# Altium PCB PCB1.PcbDoc
Units mil, origin at the board's own origin, x right, y up, seen from the top; angles counter-clockwise.
Board outline 2952.73 x 3770 mil, 2 copper layers (Top Layer, Bottom Layer); 67 components, 41 nets, 217 pads, 30 vias.
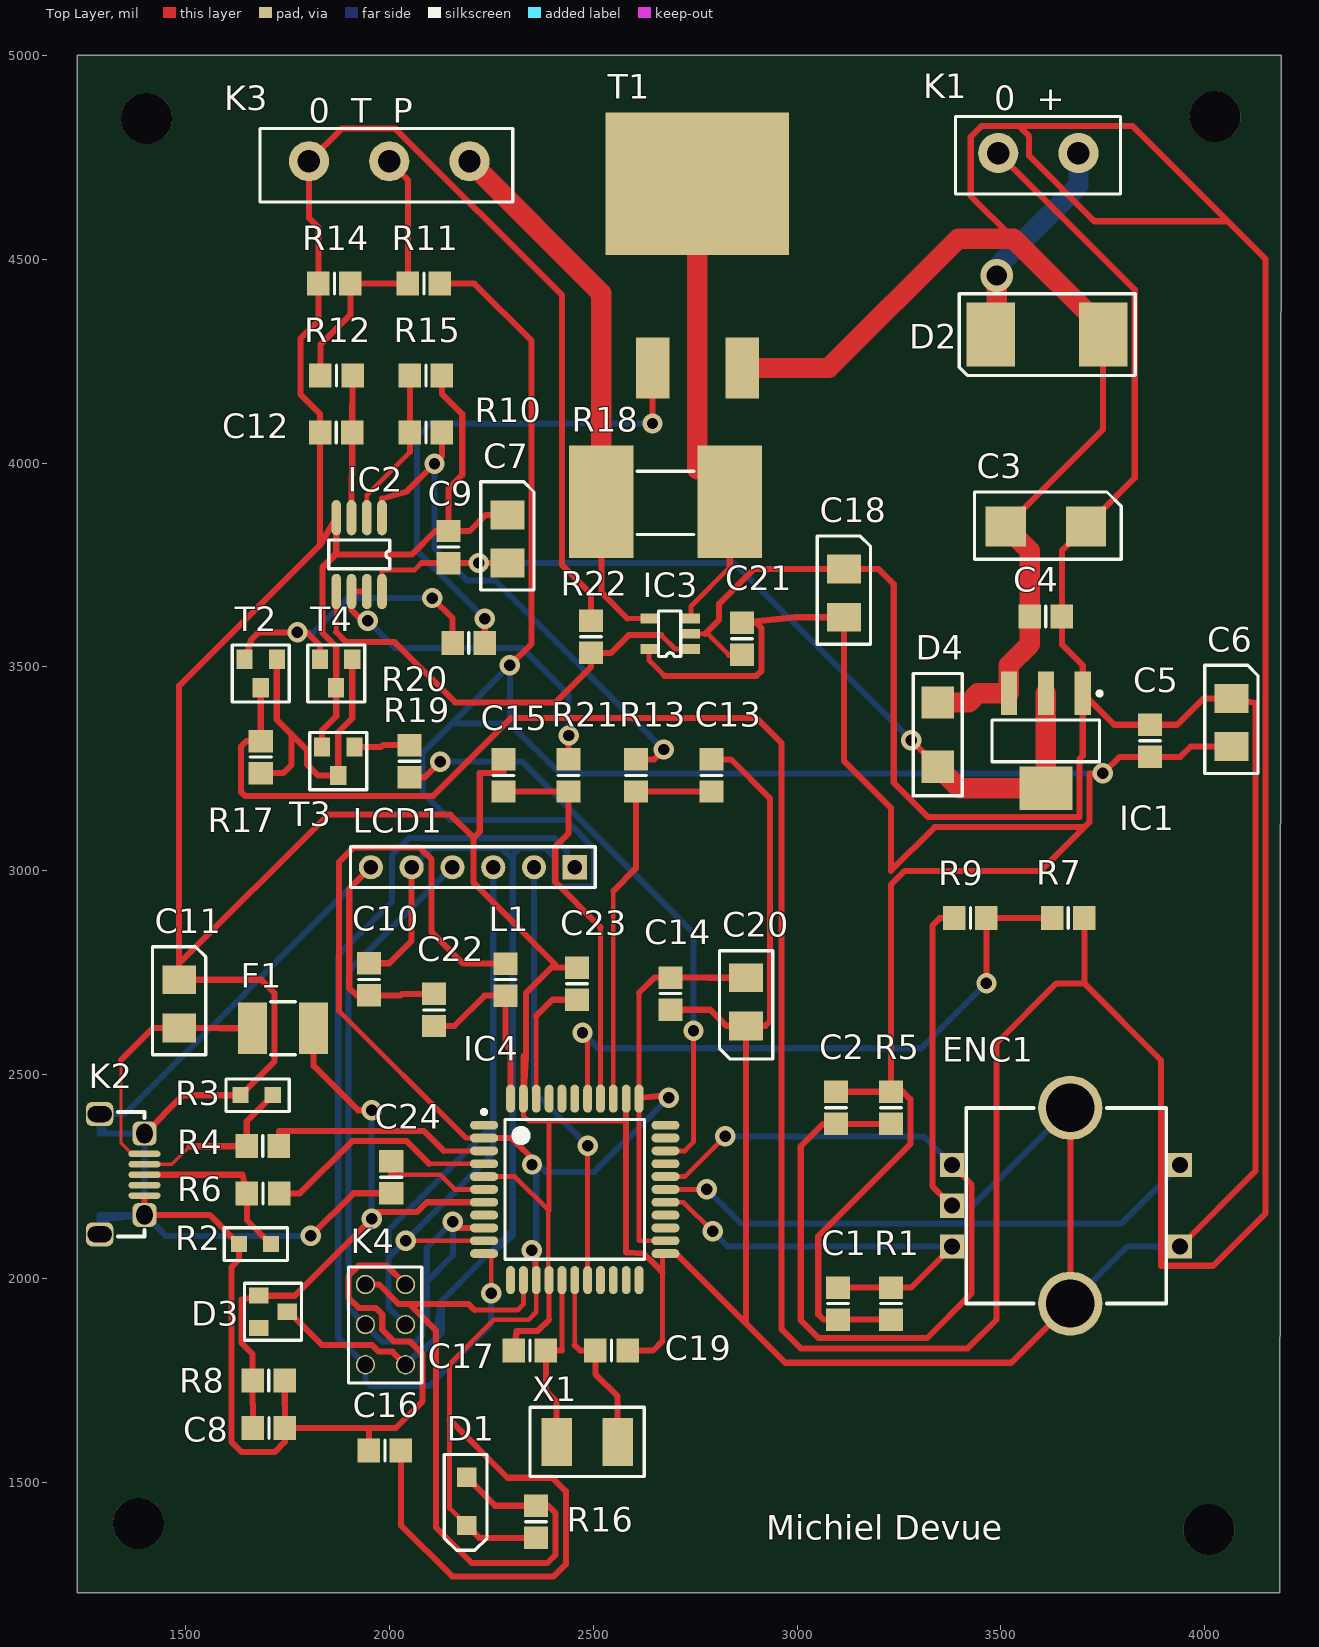
[diagram p0: Top Layer view]
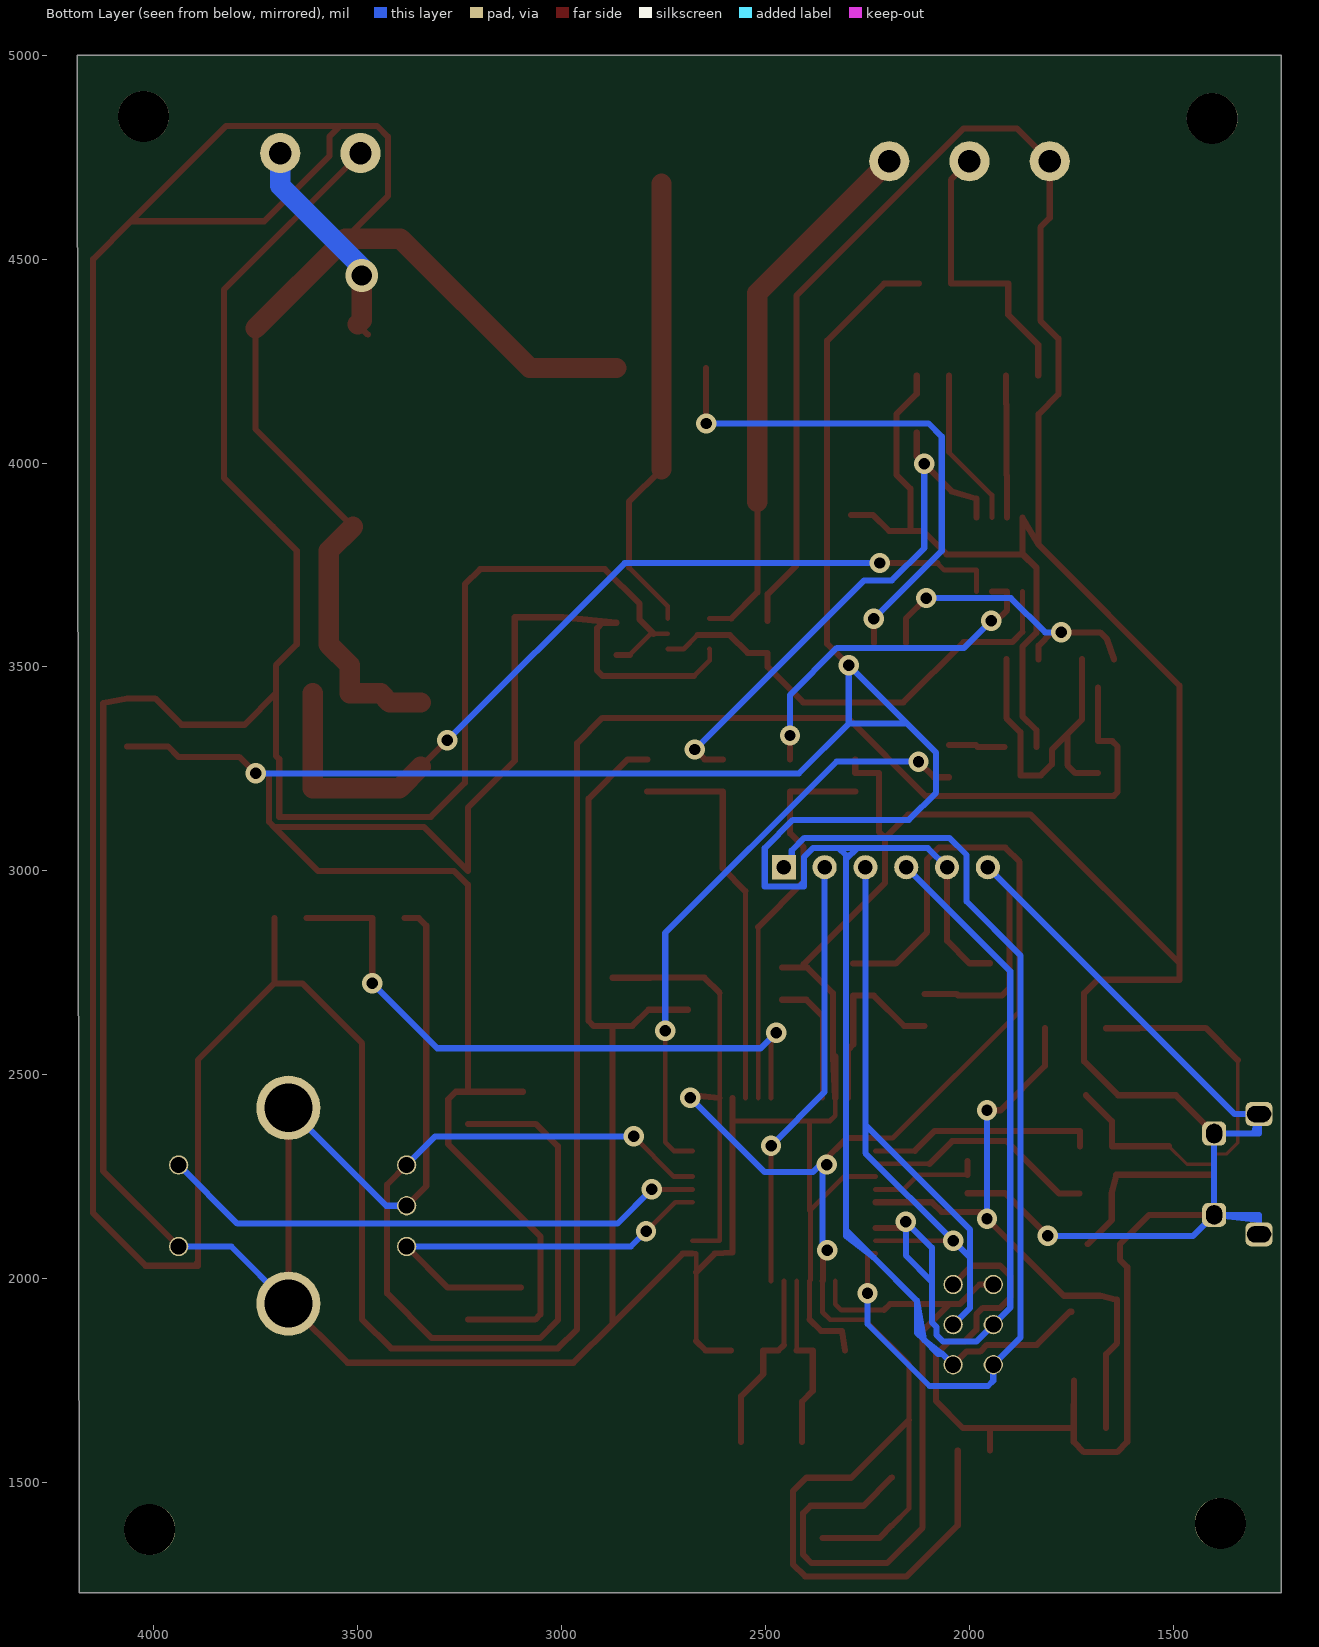
[diagram p1: Bottom Layer view, seen from below]

## Layer stack, top to bottom
Top Solder: solder mask 0.4, Solder Resist, Dk 3.5
Top Layer: signal copper 1.4
Dielectric 1: dielectric 12.6, FR-4, Dk 4.8
Bottom Layer: signal copper 1.4
Bottom Solder: solder mask 0.4, Solder Resist, Dk 3.5

## Board outline
4187.73,5000 1235,5000 1235,1230 4183.01,1230

## Design rules (kind name [scope] priority, off if disabled: settings)
Clearance [All] p1: gap=10 ignorepadtopadclearanceinfootprint=TRUE
HoleSize [All] p1: absolutevalues=TRUE maxlimit=126 minlimit=1 maxpercent=80.000 minpercent=20.000
MinimumSolderMaskSliver [All] p1: minsoldermaskwidth=1
PolygonConnect [All] p1: connectstyle=Relief reliefconductorwidth=10 reliefentries=4 polygonreliefangle="90 Angle" airgapwidth=10
RoutingVias [All] p1: holewidth=28 width=50 viastyle="Through Hole" minholewidth=28 minwidth=50 maxholewidth=28 maxwidth=50
SMDNeckDown [InNet('No Net')] p1: percent=95.000
SilkToSilkClearance [All] p1: silktosilkclearance=5
SilkToSolderMaskClearance [IsPad] p1: minsilkscreentomaskgap=0 clearancetoexposedcopper=TRUE
SolderMaskExpansion [All] p1: expansion=4 istentingtop=FALSE
Width [All] p1: maxlimit=50 minlimit=5 preferedwidth=15 minimp=50.000000 maximp=50.000000 favimp=50.000000
26 further rules are at their usual default settings.

## Components (designator, comment, footprint, x,y, rotation, side; value= is the part's Value field where it differs from the comment)
C1 "Cap" 6-0805_M 3100,1939.06 r270 top value=10n
C2 "Cap" 6-0805_M 3095,2419.06 r90 top value=10n
C3 "Cap Pol1" "Case C" 3610,3844.06 r0 top value=100pF
C4 "Cap" 6-0805_M 3610,3624.06 r180 top value=100n
C5 "Cap" 6-0805_M 3865,3319.06 r270 top value=100n
C6 "Cap Pol1" "Case A" 4065,3364.06 r90 top value=47u
C7 "Cap Pol1" "Case A" 2290,3814.06 r90 top value=10u
C8 "Cap" 6-0805_M 1705,1634.06 r180 top value=100n
C9 "Cap" 6-0805_M 2145,3794.06 r270 top value=100n
C10 "Cap" 6-0805_M 1950,2734.06 r90 top value=100n
C11 "Cap Pol1" "Case A" 1485,2674.06 r90 top value=22u
C12 "Cap" 6-0805_M 1870,4075 r0 top value=10n
C13 "Cap" 6-0805_M 2790,3234.06 r270 top value=10n
C14 "Cap" 6-0805_M 2690,2699.06 r90 top value=100n
C15 "Cap" 6-0805_M 2280,3234.06 r270 top value=1µ
C16 "Cap" 6-0805_M 1989.37,1579.06 r0 top value=100n
C17 "Cap" 6-0805_M 2345,1824.06 r0 top value=22p
C18 "Cap Pol1" "Case A" 3115,3680.94 r90 top value=10u
C19 "Cap" 6-0805_M 2545,1824.06 r180 top value=22p
C20 "Cap Pol1" "Case A" 2875,2679.06 r270 top value="10u 10V"
C21 "Cap" 6-0805_M 2865,3569.06 r90 top value=100n
C22 "Cap" 6-0805_M 2110,2659.06 r270 top value=1u
C23 "Cap" 6-0805_M 2460,2723.43 r270 top value=100n
C24 "Cap" 6-0805_M 2005,2249.06 r90 top value=1u
D1 "Diode" Diode1 2190,1454.06 r270 top
D2 "Diode 10TQ035" DIODE2 3612.8,4315 r180 top
D3 "Diode 10TQ035" DIODE3 1680,1919.06 r270 top
D4 "Diode" DIODE4 3345,3334.06 r90 top
ENC1 "PEC11R-4215F-S0024" ENCODER 3380,2079.06 r0 top
F1 "Fuse 1" Fuse 1740,2614.06 r0 top
IC1 "IC1" SOT223_M 3610,3319.06 r270 top (schematic designator NCP1117-5)
IC2 "IC2" IC2 1982.4,3866.1 r270 top
IC3 "INA138" INA138NA/250G4 2740,3544.06 r180 top
IC4 "ATmega32U4-AU" 44ML_N 2455,2219.06 r0 top
K1 "691111710003" K1 3493.15,4760 r0 top
K2 "K2" K2 1400,2203.82 r180 top
K3 "Soldeer tip" K3 1803.15,4740 r0 top
K4 "ICSP" K4 2040,1789.06 r180 top
L1 "MH2029-300Y" 6-0805_M 2285,2733.43 r270 top value=10mH
LCD1 "Header 6" HDR1X6 2455,3009.06 r180 top
R1 "Res2" 6-0805_M 3230,1939.06 r270 top value=10K
R2 "Res Varistor" R2+R3 1670.63,2085 r0 top
R3 "Res Varistor" R2+R3 1675,2450 r0 top
R4 "Res2" 6-0805_M 1690,2325 r0 top value=22R
R5 "Res2" 6-0805_M 3230,2419.06 r90 top value=10K
R6 "Res2" 6-0805_M 1690.63,2209.06 r0 top value=22R
R7 "Res2" 6-0805_M 3665,2884.06 r0 top value=10K
R8 "Res2" 6-0805_M 1704.37,1750 r180 top value=10K
R9 "Res2" 6-0805_M 3425,2884.06 r0 top value=2K7
R10 "Res2" 6-0805_M 2090,4075 r180 top value=18K
R11 "Res2" 6-0805_M 2085,4440 r0 top value=1M
R12 "Res2" 6-0805_M 1870.63,4215 r180 top value=5K6
R13 "Res2" 6-0805_M 2605,3234.06 r90 top value=5K6
R14 "Res2" 6-0805_M 1865.63,4440 r0 top value=10M
R15 "Res2" 6-0805_M 2090,4215 r180 top value=100R
R16 "Res2" 6-0805_M 2360,1404.06 r270 top value=10K
R17 "Res2" 6-0805_M 1685,3279.06 r90 top value=4K7
R18 "Res2" R18 2677.52,3905 r180 top value=0R020
R19 "Res2" 6-0805_M 2050,3269.06 r90 top value=10K
R20 "Res2" 6-0805_M 2195,3559.06 r0 top value=100R
R21 "Res2" 6-0805_M 2440,3234.06 r90 top value=100K
R22 "Res2" 6-0805_M 2495,3574.06 r90 top value=560K
T1 "IRF9540NSPBF" IRF9540NSPBF 25060.62,-28576.8 r0 top
T2 "NPN" BC847 1685,3519.06 r180 top
T3 "NPN" BC847 1875,3304.06 r180 top
T4 "NPN" BC857 1870,3519.06 r180 top
X1 "ABS25-32.768KHZ-6-T" X 2485.2,1600 r180 top

## Footprints (in the part's own frame and the unit in brackets; to place one, negate y for a bottom-side part, rotate by r counter-clockwise, add the part's x,y. Pads: shape width x height; smd on the part's side, far side on the other; paste and mask are expansions set on the pad)
6-0805_M [mm] "Chip Resistor, Body 2.0x1.2mm, IPC Low Density"
  rect 1.4x1.5 smd: 1(-1,0) 2(1,0)
  silkscreen extent 0,-0.65 0,0.65, body extent -1.07,-0.7 1.07,0.7, height 0.7
44ML_N [mm] "Thin QFP, 44-Leads, Body 10x10mm, Pitch 0.8mm, IPC Medium Density"
  oval 1.75x0.55 smd: 1(-5.65,4) 2(-5.65,3.2) 3(-5.65,2.4) 4(-5.65,1.6) 5(-5.65,0.8) 6(-5.65,0) 7(-5.65,-0.8) 8(-5.65,-1.6) 9(-5.65,-2.4) 10(-5.65,-3.2) 11(-5.65,-4) 23(5.65,-4) 24(5.65,-3.2) 25(5.65,-2.4) 26(5.65,-1.6) 27(5.65,-0.8) 28(5.65,0) 29(5.65,0.8) 30(5.65,1.6) 31(5.65,2.4) 32(5.65,3.2) 33(5.65,4)
  oval 0.55x1.75 smd: 12(-4,-5.65) 13(-3.2,-5.65) 14(-2.4,-5.65) 15(-1.6,-5.65) 16(-0.8,-5.65) 17(0,-5.65) 18(0.8,-5.65) 19(1.6,-5.65) 20(2.4,-5.65) 21(3.2,-5.65) 22(4,-5.65) 34(4,5.65) 35(3.2,5.65) 36(2.4,5.65) 37(1.6,5.65) 38(0.8,5.65) 39(0,5.65) 40(-0.8,5.65) 41(-1.6,5.65) 42(-2.4,5.65) 43(-3.2,5.65) 44(-4,5.65)
  silkscreen extent -5.77,-4.35 4.35,4.95, body extent -5,-5 5,5, height 1.2
BC847 [mm]
  rect 1x1.2 smd: 1(0,1.778) 2(-1,0) 3(1,0)
  silkscreen extent -1.78,-0.89 1.78,2.67
BC857 [mm]
  rect 1x1.2 smd: 1(1,0) 2(-1,0) 3(0,1.778)
  silkscreen extent -1.78,-0.89 1.78,2.67
"Case A" [mm]
  rect 1.8x2.1 smd: 1(-1.5,0) 2(1.5,0)
  silkscreen extent -3.17,-1.65 3.56,1.67
"Case C" [mm]
  rect 2.5x2.5 smd: 1(-2.5,0) 2(2.5,0)
  silkscreen extent -4.44,-2.03 4.7,2.16
Diode1 [mm]
  rect 1.2x1.2 smd: 1(-1.5,0) 2(1.5,0)
  silkscreen extent -2.92,-1.4 3.05,1.27
DIODE2 [mm]
  rect 3x4 smd: 1(-3.5,0) 3(3.5,0)
  silkscreen extent -5.5,-2.54 5.46,2.54
DIODE3 [mm]
  rect 1x1.2 smd: 1(0,1.778) 2(1,0) 3(-1,0)
  silkscreen extent -1.78,-0.89 1.78,2.67
DIODE4 [mm]
  rect 2x2 smd: 1(-2,0) 2(2,0)
  silkscreen extent -3.81,-1.52 3.81,1.52
ENCODER [mm]
  rect 1.5x1.5 / inner round 1.2 / far side round 1.2 hole 1: 1(14.2,5.08) 2(14.2,0) 3(0,0) 4(0,2.54) 5(0,5.08)
  round 4 hole 3: 6(7.366,8.636) 7(7.366,-3.556)
  silkscreen extent 0.89,-3.56 13.33,8.64
Fuse [mm]
  rect 1.8x3.2 smd: 1(-1.9,0) 2(1.9,0)
  silkscreen extent -0.8,-1.65 0.76,1.65
HDR1X6 [mm] "Connector; Header; 6 Position"
  rect 1.5x1.5 hole 0.9: 1(0,0)
  round 1.5 hole 0.9: 2(2.54,0) 3(5.08,0) 4(7.62,0) 5(10.16,0) 6(12.7,0)
  silkscreen extent -1.27,-1.27 13.97,1.27
IC2 [mm]
  oval 2.2x0.6 smd: 1(0,0) 2(0,-0.95) 3(0,-1.9) 4(0,-2.85) 5(4.6,-2.85) 6(4.6,-1.9) 7(4.6,-0.95) 8(4.6,0)
  silkscreen extent 1.4,-3.33 3.18,0.48
INA138NA/250G4 [mm]
  rect 1.1x0.6 smd: 1(0,0) 2(0,-0.95) 3(0,-1.9) 4(2.6,-1.9) 5(2.6,0)
  silkscreen extent 0.63,-2.38 2.03,0.48
IRF9540NSPBF [mil]
  rect 450x350 smd: D(-22305.62,33261.8)
  rect 82x150 smd: G(-22415,32810) S(-22195,32810)
K1 [mm]
  round 2.5 hole 1.4: 1(0,0) 2(5,0)
  silkscreen extent -2.67,-2.54 7.62,2.29
K2 [mm]
  oval 2x0.4 smd: 1(0,-2.6) 2(0,-1.95) 3(0,-1.3) 4(0,-0.65) 5(0,0)
  rrect50% 1.7x1.5 hole 1 slot 1.5 at 0 deg: SHIELD1(2.794,-5.08) SHIELD4(2.794,2.413)
  rrect50% 1.5x1.5 hole 1.2 slot 1 at 0 deg: SHIELD2(0,-3.867) SHIELD3(0,1.2)
  silkscreen extent 0,-5.21 1.65,2.54
K3 [mm]
  round 2.5 hole 1.4: 1(0,0) 2(5,0) 3(10,0)
  silkscreen extent -3.05,-2.54 12.7,2.03
K4 [mm]
  round 1.2 hole 1: 1(0,0) 2(2.5,0) 3(0,-2.5) 4(2.5,-2.5) 5(0,-5) 6(2.5,-5)
  silkscreen extent -1.02,-6.1 3.56,1.14
R2+R3 [mm]
  rect 1x1 smd: 1(-1,0) 2(1,0)
  silkscreen extent -1.9,-1.02 2.03,1.02
R18 [mm]
  rect 4x7 smd: 1(-4,0) 2(4,0)
  silkscreen extent -1.78,-1.91 1.78,2.03
SOT223_M [mm] "SOT223, 4-Leads, Body 6.5x3.5mm, Pitch 2.3mm, Lead Span 7mm, IPC Low Density"
  rect 2.7x1 smd: 1(-2.95,2.3) 2(-2.95,0) 3(-2.95,-2.3)
  rect 2.7x3.3 smd: 4(2.95,0)
  silkscreen extent -3.07,-3.35 1.3,3.48, body extent -1.85,-3.35 1.85,3.35, height 1.7
X [mm]
  rect 1.9x3 smd: 1(-1.9,0) 4(1.9,0)
  silkscreen extent -3.56,-2.16 3.56,2.16

## Part data
C1 C2 C4 C5 C8 C9 C10 C12 C13 C14 C15 C16 C17 C19 C21 C22 C23 C24: "Capacitor", LatestRevisionDate=17-Jul-2002, LatestRevisionNote="Re-released for DXP Platform.", PackageDescription="Radial Cap, Thru-Hole; 2 Leads; 0.3 in Pin Spacing", PackageReference=RAD-0.3, Published=8-Jun-2000, Publisher="Altium Limited"
C3 C6 C7 C11 C18 C20: "Polarized Capacitor (Radial)", LatestRevisionDate=17-Jul-2002, LatestRevisionNote="Re-released for DXP Platform.", PackageDescription="Polarized Capacitor (Radial); 2 Leads", PackageReference=RB7.6-15, Published=8-Jun-2000, Publisher="Altium Limited"
D1 D4: "Default Diode", Code_JEDEC=DO-214-AB, LatestRevisionDate=17-Jul-2002, LatestRevisionNote="Re-released for DXP Platform.", PackageDescription="DO-214-AB/SMC; 2 C-Bend Leads; Body 7.9 x 5.9 mm, inc. leads (LxW)", PackageReference=SMC, PackageVersion=Sep-1996, Published=8-Jun-2000, Publisher="Altium Limited"
D2 D3: "Schottky Rectifier", ComponentLink1Description="Manufacturer Link", ComponentLink1URL=http://www.irf.com/, ComponentLink2Description=Datasheet, ComponentLink2URL=http://www.irf.com/product-info/datasheets/data/10tq.pdf, DatasheetVersion=PD-2.057B, LatestRevisionDate=17-Jul-2002, LatestRevisionNote="Re-released for DXP Platform.", Note="Terminal 2 is the TAB and is electrically connected to the cathode", PackageDescription="TO, Thru-Hole, Vertical, Heatsink Mounted; 3 In-Line Leads (1 Absent); Pitch 2.54 mm", PackageReference=TO-220AC, PackageVersion=Feb-1998, Published=8-Jun-2000, Publisher="Altium Limited"
ENC1: library part CMP-1747-00012-1, "12 mm Incremental Encoder, 24 Detent, -30 to 70 degC, 5-Pin THD, RoHS, Bulk", Case\Package=Axial, Max Operating Temperature="155 degC", Min Operating Temperature="-55 degC", Package Quantity=200, Power Rating="250 mW", Resistance="100 kohm", Tolerance=1%, Voltage Rating="250 V", ComponentLink1Description="Manufacturer URL", ComponentLink1URL=http://www.bourns.com/, ComponentLink2Description=Datasheet, ComponentLink2URL=http://www.bourns.com/docs/Product-Datasheets/PEC11R.pdf, DatasheetVersion=Jul-14, Length="0.248 inch", Mount="Through Hole", PackageDescription="5-Pin Through Hole Device, Body 12.5 x 13.4 mm", PackageReference=PEC11R-4XXXF-SXXXX, Packaging=Bulk, RoHSCompliant=true
F1: "Fuse", LatestRevisionDate=17-Jul-2002, LatestRevisionNote="Re-released for DXP Platform.", PackageDescription="Thru-Hole; 2 Leads", PackageReference=PIN-W2/E2.8, Published=8-Jun-2000, Publisher="Altium Limited"
IC2: library part MCP6002-E/SN, "OP Amp Dual GP R-R I/O 6V Automotive 8-Pin SOIC N Tube", Manufacturer=Microchip, Supplier Part Number 1=MCP6002-E/SN-ND, Category="Amplifiers - Op Amps, Buffer, Instrumentation", ComponentLink1Description=https://datasheet.ciiva.com/19474/1285896-19474572.pdf?src-supplier=Jameco, ComponentLink1URL=https://datasheet.ciiva.com/19474/1285896-19474572.pdf?src-supplier=Jameco, ComponentLink2Description=https://datasheet.ciiva.com/1793/21733j-1793395.pdf?src-supplier=Digi-Key, ComponentLink2URL=https://datasheet.ciiva.com/1793/21733j-1793395.pdf?src-supplier=Digi-Key, ComponentLink3Description=https://datasheet.ciiva.com/16378/filehandler-aspxddocname-en011705-16378791.pdf?src-supplier=Future+Electronics, ComponentLink3URL=https://datasheet.ciiva.com/16378/filehandler-aspxddocname-en011705-16378791.pdf?src-supplier=Future+Electronics, ComponentLink4Description=https://datasheet.ciiva.com/4756/21733e-41017-4756360.pdf?src-supplier=Mouser, ComponentLink4URL=https://datasheet.ciiva.com/4756/21733e-41017-4756360.pdf?src-supplier=Mouser, ComponentLink5Description=https://datasheet.ciiva.com/7653/524878-7653496.pdf?src-supplier=Element14, ComponentLink5URL=https://datasheet.ciiva.com/7653/524878-7653496.pdf?src-supplier=Element14, ComponentLink6Description=https://datasheet.ciiva.com/11706/jp011705-11706856.pdf?src-supplier=Avnet, ComponentLink6URL=https://datasheet.ciiva.com/11706/jp011705-11706856.pdf?src-supplier=Avnet, ComponentLink7Description=https://datasheet.ciiva.com/14151/bsmicrochip-op-verstaerker-mcp600-en-14151452.pdf?src-supplier=Distrelec, ComponentLink7URL=https://datasheet.ciiva.com/14151/bsmicrochip-op-verstaerker-mcp600-en-14151452.pdf?src-supplier=Distrelec, Manufacturer Part Number=MCP6002-E/SN, Pricing 1="1=0,36000, 25=0,30000, 100=0,27000 (USD)", RoHS=Yes, Stock 1=1931, Supplier 1=Digi-Key
IC3: library part INA138NA/250G4, "SP Amp Current Sense Amp Single 36V 5-Pin SOT-23 T/R", Case/Package=SOT-23, Input Bias Current=2uA, Input Offset Voltage (Vos)=1mV, Manufacturer="Texas Instruments", Max Operating Temperature=125°C, Max Supply Voltage=36V, Min Operating Temperature=-40°C, Min Supply Voltage=2.7V, Nominal Supply Current=25uA, Operating Supply Current=45uA, Operating Supply Voltage=28V, Supplier Part Number 1=296-35902-1-ND, Accuracy=0.5%, Bandwidth=800kHz, Category="Amplifiers - Op Amps, Buffer, Instrumentation", Common Mode Rejection Ratio=100dB, ComponentLink1Description=https://datasheet.ciiva.com/1940/ina138-1940082.pdf?src-supplier=Digi-Key, ComponentLink1URL=https://datasheet.ciiva.com/1940/ina138-1940082.pdf?src-supplier=Digi-Key, ComponentLink2Description=https://datasheet.ciiva.com/1484/1864388-1484499.pdf?src-supplier=Element14, ComponentLink2URL=https://datasheet.ciiva.com/1484/1864388-1484499.pdf?src-supplier=Element14, ComponentLink3Description=https://datasheet.ciiva.com/2977/ina168-2977829.pdf?src-supplier=Avnet, ComponentLink3URL=https://datasheet.ciiva.com/2977/ina168-2977829.pdf?src-supplier=Avnet, ComponentLink4Description=https://datasheet.ciiva.com/18617/ina138-18617510.pdf?src-supplier=Digi-Key, ComponentLink4URL=https://datasheet.ciiva.com/18617/ina138-18617510.pdf?src-supplier=Digi-Key, ComponentLink5Description=https://datasheet.ciiva.com/18617/ina138-18617511.pdf?src-supplier=Digi-Key, ComponentLink5URL=https://datasheet.ciiva.com/18617/ina138-18617511.pdf?src-supplier=Digi-Key, ComponentLink6Description=https://datasheet.ciiva.com/18617/ina138-18617512.pdf?src-supplier=Digi-Key, ComponentLink6URL=https://datasheet.ciiva.com/18617/ina138-18617512.pdf?src-supplier=Digi-Key, Contact Plating=Tin,Matte, Height=1.15mm, Lead Free="Lead Free", Length=2.9mm, Manufacturer Part Number=INA138NA/250G4, Mount="Surface Mount", Number of Amplifiers=1, Number of Channels=1, Number of Elements=1, Number of Pins=5, Packaging="Tape and Reel", Pricing 1="1=2,21000, 10=1,98200, 25=1,87000, 100=1,49600 (USD)", Radiation Hardening=No, REACH SVHC="No SVHC", RoHS=Yes, Stock 1=2503, Supplier 1=Digi-Key, Termination=SMD/SMT, Weight=0.000617oz, Width=1.6mm
IC4: library part CMP-0095-00285-2, "8-bit AVR Microcontroller, 2.7-5.5V, 16MHz, 32KB Flash, 1KB EEPROM, 2.5KB SRAM, USB Controller, 44-pin TQFP, Industrial Grade (-40°C to 85°C), Ext Osc", ComponentLink1Description="Manufacturer URL", ComponentLink1URL=http://www.atmel.com/, ComponentLink2Description="ATmega16U4/32U4 Datasheet", ComponentLink2URL=http://www.atmel.com/dyn/resources/prod_documents/doc7766.pdf, ComponentLink3Description="ATmega16U4 ATmega32U4 Summary", ComponentLink3URL=http://www.atmel.com/dyn/resources/prod_documents/7766S.pdf, DatasheetVersion="revF, Nov-2010", PackageDescription="44-Pin Plastic Thin Quad Flat Pack, 10 x 10 x 1.0 mm Body, 0.8 mm Pitch (TQFP)", PackageReference=44ML, PackageVersion="rev.G, Jul-2007", RevisionNote="DatasheetVersion updated. URLs added."
K1: library part CMP-1502-03263-1, "Series 111 - 5.00 mm Horizontal Entry Modular with Pressure Clamp WR-TBL, 3 pin", Manufacturer="Wurth Elektronik", Operating Temperature=-40to105degC, Datasheet URL=http://katalog.we-online.de/em/datasheet/6911117100xx.pdf, Manufacturer URL=http://www.we-online.de, Mounting Technology=THT, Package Reference=691111710003, Packaging=Box, Part Number=691111710003, Pin Number=3, Pitch=5.00mm, Publisher=WurthElektronik
K3: library part "Header 3", "Header, 3-Pin", LatestRevisionDate=17-Jul-2002, LatestRevisionNote="Re-released for DXP Platform.", Publisher="Altium Limited"
K4: library part "Header 3X2", "Header, 3-Pin, Dual row", LatestRevisionDate=17-Jul-2002, LatestRevisionNote="Re-released for DXP Platform.", Publisher="Altium Limited"
L1: library part Inductor, "Inductor", Code_IEC=1005, Code_JEITA=0402, LatestRevisionDate=29-May-2009, LatestRevisionNote="IPC-7351 Footprint Added.", PackageDescription="Chip Inductor", PackageReference=0402-A, Published=8-Jun-2000, Publisher="Altium Limited"
LCD1: "Header, 6-Pin", LatestRevisionDate=17-Jul-2002, LatestRevisionNote="Re-released for DXP Platform.", Publisher="Altium Limited"
R1 R4 R5 R6 R7 R8 R9 R10 R11 R12 R13 R14 R15 R16 R17 R18 R19 R20 R21 R22: "Resistor", LatestRevisionDate=17-Jul-2002, LatestRevisionNote="Re-released for DXP Platform.", PackageDescription="Axial Device, Thru-Hole; 2 Leads; 0.4 in Pin Spacing", PackageReference=AXIAL-0.4, Published=8-Jun-2000, Publisher="Altium Limited"
R2 R3: "Varistor (Voltage-Sensitive Resistor)", Code_IPC=RESC2012, LatestRevisionDate=29-May-2009, LatestRevisionNote="IPC-7351 Footprint Added.", PackageDescription="Chip Resistor 0805 Case Size", PackageReference=6-0805, PackageVersion=Mar-2003, Published=24-Mar-1999, Publisher="Altium Limited"
T1: "International Rectifier IRF9540NSPBF, MOSFET", Case/Package=D2PAK, Continuous Drain Current (ID)=23A, Drain to Source Breakdown Voltage=-100V, Drain to Source Resistance=117mR, Drain to Source Voltage (Vdss)=100V, Gate to Source Voltage (Vgs)=20V, Input Capacitance=1.45nF, Manufacturer="International Rectifier", Max Operating Temperature=175°C, Max Power Dissipation=3.1W, Min Operating Temperature=-55°C, Package Quantity=50, Power Dissipation=3.8W, Supplier Part Number 1=1298541, Category=MOSFETs, ComponentLink1Description=https://datasheet.ciiva.com/19479/1561571-19479846.pdf?src-supplier=Jameco, ComponentLink1URL=https://datasheet.ciiva.com/19479/1561571-19479846.pdf?src-supplier=Jameco, ComponentLink2Description=https://datasheet.ciiva.com/26789/irf9540nspbf-26789462.pdf?src-supplier=IIIC, ComponentLink2URL=https://datasheet.ciiva.com/26789/irf9540nspbf-26789462.pdf?src-supplier=IIIC, ComponentLink3Description=https://datasheet.ciiva.com/7835/irf9540nspbf-7835624.pdf?src-supplier=Element14, ComponentLink3URL=https://datasheet.ciiva.com/7835/irf9540nspbf-7835624.pdf?src-supplier=Element14, ComponentLink4Description=https://datasheet.ciiva.com/948/irf9540nspbf-948490.pdf?src-supplier=Digi-Key, ComponentLink4URL=https://datasheet.ciiva.com/948/irf9540nspbf-948490.pdf?src-supplier=Digi-Key, Dual Supply Voltage=100V, Element Configuration=Single, Fall Time=51ns, Height=4.83mm, Lead Free="Lead Free", Length=10.67mm, Manufacturer Part Number=IRF9540NSPBF, Mount="Surface Mount", Nominal Vgs=-4V, Number of Elements=1, Number of Pins=3, Packaging=Rail/Tube, Pricing 1="5=1,53000, 10=1,20000, 100=0,87700, 250=0,74400, 500=0,61200, 1000=0,50700, 5000=0,48500 (EUR)", Radiation Hardening=No, Rds On Max=117mR, REACH SVHC="No SVHC", Recovery Time=210ns, Rise Time=67ns, RoHS=Yes, Stock 1=4486, Supplier 1=Farnell, Turn-Off Delay Time=51ns, Turn-On Delay Time=15ns, Width=9.65mm
T2 T3 T4: "NPN Bipolar Transistor", Code_JEDEC=TO-226-AA, LatestRevisionDate=17-Jul-2002, LatestRevisionNote="Re-released for DXP Platform.", PackageDescription="TO, Flat Index; 3 In-Line, Axial Leads; Body Dia. 4.8mm; Leads 0.55 x 0.51 mm (max)", PackageReference=TO-226-AA, Published=8-Jun-2000, Publisher="Altium Limited"
X1: library part CMP-2000-05036-1, "Low Frequency Crystal, 32.768 KHz, 6 pF, +/- 20 ppm, -40 to 85 degC, 4-Pin SMD, RoHS, Tape and Reel", Case Height=2.5mm, Case Length=8mm, Case Width=3.8mm, Frequency=16MHz, Load Capacitance=6pF, Manufacturer=Abracon, Operating Temperature Range=-40Cto+85C, Package / Case=8mmx3.8mm, Package Description="4-Pin Surface Mount Device, Body 8 x 3.8 mm, Pitch 5.5 mm", Package Reference=ABS25, Tolerance=20PPM, Brand=ABRACON, Datasheet URL=https://datasheet.ciiva.com/854/abs25-854528.pdf, Datasheet Version=Jun-17, Dimensions=3.8mmWx8mmLx2.5mmH, ESR=50kOhms, Factory Pack Quantity=3000, Manufacturer URL=http://www.abracon.com/, Mounting Style=SMD/SMT, Packaging=Reel, Product Category=Crystals, RoHS=Details, Series=ABS25, Termination Style=SMD/SMT, Type=LowFrequencyCrystal

## Free pads (board coordinates)
  round 125 hole 125 unplated: 3(1385,1400) 3(1405,4845) 3(4010,1385) 3(4025,4850)

## Via types
v1: diameter 50, hole 28, Top Layer to Bottom Layer, 29 vias
v2: diameter 80, hole 50, Top Layer to Bottom Layer, 1 vias

## Nets (pads, with @x,y where several pads share a name; then routed paths per layer and width w, separated by ;. In a path a pad name is that pad's centre, name@x,y a point inside that pad or via, vN(x,y) a via of type N, cw(c..) or ccw(c..) an arc to the next point about the centre after c; other vN are vias at no path point)
+5: C1.2 C2.2 C5.2 C6.1 C10.2 C18.1 C21.2 D3.1 IC3.5 K4.1 LCD1.5 R1.2 R5.2 R11.2 | length 11230.9
  Top Layer w11.81: IC3.5 2637,3544.06 2637,3516 2675,3478
  Top Layer w15: D3.1 1753.94,1919.06 1835,1838 1957.24,1838 1973.88,1821.36 2007.7,1821.36 K4.1 ; C10.2 2000,2773.43 2055,2828.43 LCD1.5 ; R11.2 2209,4440 2349,4300 2349,3557 v1(2296,3504) ; 2675,3478 2900,3478 2913,3491 2913,3595.43 2900,3608.43 C21.2 2996.46,3621.89 C18.1 3115,3270 3230,3155 3230,3000 3337.26,3107.26 3704.73,3107.26 ; C2.2 R5.2 ; R1.2 C1.2 3064.81,1899.69 3052,1912.5 3052,2104 3278,2330 3278,2440 3259.57,2458.43 R5.2 ; C6.1 3965,3305 3939.69,3279.69 C5.2 3790.69,3279.69 v1(3750,3239) 3717.46,3239 3717.46,3120 3704.73,3107.26 ; R5.2 3230,2966 3264,3000 3597.46,3000 3704.73,3107.26
  Bottom Layer w15: K4.1 2066.98,1816.04 ; LCD1.5 2102.03,3056.08 2275,3056.08 ; v1(3750,3239) 2791,3239 2418,3239 2296,3361 ; 2066.98,1816.04 2077.48,1816.04 2111.44,1850 ; 2066.98,1816.04 2111.44,1850 ; 2111.44,1850 2128.69,1946.02 ; 2111.44,1850 2128.69,1867.25 2128.69,1946.02 ; 2128.69,1946.02 2234.73,2052.06 ; 2153,3361 v1(2296,3504) 2296,3361 ; 2153,3361 2082,3290 2082,3192 2149,3125 2433.11,3125 2502.03,3056.08 2502.03,2962 2416,2962 ; 2153,3361 2296,3361 ; 2234.73,2052.06 2303,2120.32 ; 2234.73,2052.06 2303,2105.06 2303,2120.32 ; 2275,3056.08 2320.08,3056.08 ; 2275,3056.08 2303,3028.08 ; 2303,2120.32 2303,3028.08 ; 2303,3028.08 2303,3039 2320.08,3056.08 ; 2320.08,3056.08 2383.92,3056.08 2406,3034 2406,2972 ; 2406,2972 2406,2962 2416,2962 ; 2406,2972 2416,2962
A0: C13.2 IC4.36 R13.1 | length 959.2
  Top Layer w11.81: IC4.36@2549.49,2443.46 2549.49,2950.49
  Top Layer w15: 2549.49,2950.49 2605,3006 R13.1 C13.2
A1: C15.2 IC4.37 R21.1 | length 970.9
  Top Layer w11.81: IC4.37@2517.99,2443.46 2517.99,2862.01
  Top Layer w15: C15.2 R21.1 2440,3092 2407,3059 2407,2973 2517.99,2862.01
A2: IC4.38 R7.1 R9.2 | length 1557.7
  Top Layer w11.81: IC4.38@2486.5,2443.46 v1@2486.5,2590.5
  Top Layer w15: v1(2474,2603) v1@2486.5,2590.5 ; v1(3464.37,2724.37) R9.2 R7.1
  Bottom Layer w15: v1(2474,2603) 2511.96,2565.04 3305.04,2565.04 v1(3464.37,2724.37)
D3/SCL: IC4.18 LCD1.2 | length 1068.9
  Top Layer w11.81: IC4.18@2486.5,1994.65 v1(2486.5,2326.5)
  Bottom Layer w15: LCD1.2 2355,2458 v1(2486.5,2326.5)
D5: IC4.31 R19.1 | length 1474.6
  Top Layer w11.81: IC4.31@2679.41,2313.54 2725,2313.54 2746,2334.54 v1(2746,2608)
  Top Layer w15: R19.1 2086.69,3229.69 v1(2125,3268)
  Bottom Layer w15: v1(2125,3268) 2326,3268 2746,2848 v1(2746,2608)
D6: C1.1 ENC1.3 IC4.27 R1.1 | length 1067.2
  Top Layer w11.81: IC4.27@2679.41,2187.56 2721.44,2187.56 v1(2793,2116)
  Top Layer w15: C1.1 R1.1 3279.37,1978.43 ENC1.3
  Bottom Layer w15: v1(2793,2116) 2829.94,2079.06 ENC1.3
GND: C3.2 C4.1 C5.1 C6.2 C7.2 C8.1 C9.1 C10.1 C11.2 C12.1 C13.1 C14.1 C15.1 C16.1 C17.1 C18.2 C19.1 C20.2 C21.1 C22.1 C23.1 C24.1 ENC1.2 ENC1.4 ENC1.6 ENC1.7 IC1.1 IC2.4 IC3.2 IC4.5 IC4.15 IC4.23 IC4.35 IC4.43 K1.1 K2.5 K2.SHIELD1 K2.SHIELD2 K2.SHIELD3 K2.SHIELD4 K3.1 K4.5 LCD1.6 R2.1 R3.1 R8.1 R9.1 R14.1 R15.1 R22.2 T3.3 T4.3 | length 25484.6
  Top Layer w11.81: IC4.5@2230.59,2250.55 2308,2250.55 2392.01,2166.54 2392.01,2387 ; IC4.43@2329.02,2443.46 2329.02,2400 2342.02,2387 2392.01,2387 ; 2390,2168.55 2390,1996.65 2392.01,1994.65 2392.01,1900 ; 2580.98,2387 2392.01,2387 ; 2670,1847.06 2670,2016 2670,2061.57 IC4.23@2679.41,2061.57 ; IC3.2 2774.46,3581.46 2781,3581.46 2832.77,3529.69
  Top Layer w15: K2.5 K2.SHIELD3 1559.69,2156.57 R2.1 1631.26,2047 1613,2028.74 1613,1600 1638,1575 1719.37,1575 1744.37,1600 C8.1 ; K2.SHIELD2 1493.94,2450 R3.1 1719,2533.37 1719,2700 1685.89,2733.11 C11.2 1485,2773 ; R8.1 1743.74,1691.63 1744.37,1691 C8.1 ; v1(1808,2105) 1912.69,2209.69 C24.1 ; T3.3 1835.63,3344.95 1870,3379.32 T4.3 1870,3550 1836,3584 1836,3744 ; IC2.4 IC2.4@1870.2,3866 ; C16.1 1950,1634.06 ; LCD1.6 1902,2956.06 1902,2712.5 1919.81,2694.69 C10.1 2028,2694.69 2031.74,2698.43 C22.1 ; K4.5 1993.91,2032 1925,2032 1900,2007 1900,1953.6 1925,1928.6 1966.9,1928.6 1983,1912.5 1983,1875 2011.64,1846.36 2050,1846.36 2082,1814.36 2082,1700 2016.06,1634.06 1950,1634.06 ; R15.1 2129.37,4169.63 2179,4120 2179,3971 2145,3937 C9.1 ; C15.1 2280,3240 2222,3240 2222,3096 2207,3081 ; C7.2 2236.68,3873.11 2197,3833.43 C9.1 ; C17.1 2312.65,1872 2364.01,1872 2392.01,1900 ; C23.1 2397.8,2762.8 ; R22.2 2495,3678.5 2423.8,3749.7 2423.8,4411.2 2015,4820 1883.15,4820 K3.1 1803.15,4601.11 1826.26,4578 R14.1 1826.26,4349.26 1782,4305 1782,4168.63 1830.63,4120 C12.1 1830.63,3800 ; IC4.35@2580.98,2443.46 2580.98,2387 2580.98,2064.02 2624.43,2061.57 2651.92,2034.08 2670,2016 ; C19.1 2647,1824.06 2670,1847.06 ; IC4.23@2679.41,2061.57 2703.43,2061.57 2875,1890 ; C14.1 2787,2659.69 2826.69,2620 C20.2 ; 2774.46,3581.46 2809,3616 2809,3655 2894,3740 C18.2 3200,3740 3237,3703 3237,3216 3320.74,3132.26 3692.46,3132.26 3692.46,3274 3700.55,3282.09 IC1.1 ; C13.1 2838,3273.43 2934,3177.43 2934,2632 2922,2620 C20.2 ; 2832.77,3529.69 C21.1 ; ENC1.4 3332,2227.06 3332,2866.06 3350,2884.06 R9.1 ; K1.1 3828,4425.15 3828,3963.63 C3.2 3649.37,3785 C4.1 3649.37,3555.18 3700.55,3504 IC1.1 ; ENC1.6 ENC1.7 3524.94,1794 2971,1794 2875,1890 ; ENC1.2 4124,2264 4124,3411.11 C6.2 3996.68,3423.11 3932,3358.43 C5.1 3777.32,3358.43 IC1.1 ; 1485,2773 1850,3138 2150,3138 2207,3081 ; 1485,2773 1485,3454.37 1830.63,3800 ; C8.1 1950,1634.06 ; 1830.63,3800 IC2.4@1870.2,3866 ; 1836,3744 1870.2,3776 ; 1836,3744 1868,3776 1870.2,3776 ; 1870.2,3776 2056,3776 2113.43,3833.43 C9.1 ; 1870.2,3776 IC2.4@1870.2,3866 ; 2207,3081 2207,2971 2406.5,2771.5 2397.8,2762.8 ; 2335,2551 2334.65,2544.7 2329.02,2443.46 2329.02,2545.02 2335,2551 ; 2335,2551 2335,2700 2397.8,2762.8 ; 2875,1890 C20.2
  Bottom Layer w15: K2.SHIELD4 1290,2144 ; v1(1808,2105) 1451.57,2105 K2.SHIELD3 ; LCD1.6 1349.76,2403.82 K2.SHIELD1 ; ENC1.4 3430,2179.06 ENC1.6 ; ENC1.7 3810,2079.06 ENC1.2 ; 1290,2144 1290,2156.57 K2.SHIELD3 ; 1290,2144 K2.SHIELD3 ; K2.SHIELD1 1301.94,2356.06 ; K2.SHIELD1 1290,2356.06 1301.94,2356.06 ; 1301.94,2356.06 K2.SHIELD2 K2.SHIELD3
IO8: ENC1.1 IC4.28 | length 1354.1
  Top Layer w11.81: IC4.28@2679.41,2219.06 v1(2778.94,2219.06)
  Bottom Layer w15: v1(2778.94,2219.06) 2863,2135 3795,2135 ENC1.1
IO9: C2.1 ENC1.5 IC4.29 R5.1 | length 2257.8
  Top Layer w11.81: IC4.29@2679.41,2250.55 2725,2250.55 v1(2823.45,2349)
  Top Layer w15: R5.1 C2.1 3063.69,2379.69 3009,2325 3009,1898.63 3053,1854.63 3318.63,1854.63 3428,1964 3428,2231.06 ENC1.5
  Bottom Layer w15: v1(2823.45,2349) 3310.06,2349 ENC1.5
MISO: IC4.11 K4.2 LCD1.1 | length 2447.9
  Top Layer w11.81: IC4.11@2230.59,2061.57 2250,2061.57 v1(2250,1964)
  Bottom Layer w15: v1(2250,1964) 2250,1889 2098,1737 1954.57,1737 1941.57,1750 K4.2 1875,1855.63 1875,2793 2007,2925 2007,3039 2049.08,3081.08 2404.53,3081.08 2435.62,3050 2435.62,3028.44 LCD1.1
MOSI: IC4.10 K4.3 LCD1.3 | length 1867.5
  Top Layer w11.81: v1(2040.07,2093.07) IC4.10@2230.59,2093.07
  Bottom Layer w15: K4.3 1998.48,1929 1998.48,2051.48 ; LCD1.3 2255,2377.18 ; 1998.48,2051.48 v1(2040.07,2093.07) 2255,2308 2255,2377.18 ; 1998.48,2051.48 1998.48,2120.66 2255,2377.18
NetC7_1: C7.1 C9.2 D4.1 IC1.2 IC1.4 IC2.8 | length 2843.8
  Top Layer w11.81: IC2.8 1982.4,3737.5 2061.81,3737.5 2079,3754.69
  Top Layer w15: 2079,3754.69 C9.2 v1@2217,3754.69 ; v1(2220,3755) C7.1 ; v1(3280.32,3320) D4.1
  Top Layer w50: D4.1 3397.4,3202.91 IC1.4 IC1.2
  Bottom Layer w15: v1@2217,3754.69 2845.63,3754.69 ; v1(2220,3755) 2845.32,3755 2845.63,3754.69 ; v1(3280.32,3320) 2845.63,3754.69
NetC8_2: C8.2 D3.3 F1.2 IC4.7 R8.2 | length 1559.9
  Top Layer w15: C8.2 1665.63,1691 1665,1691.63 R8.2 1665,1815 1638,1842 1638,1948.43 D3.3 1768.43,1958.43 v1(1957,2147) 1974,2164 2068.44,2164 2092,2187.56 IC4.7@2230.59,2187.56 ; F1.2 1814.8,2522 1923.8,2413 v1(1957,2413)
  Bottom Layer w15: v1(1957,2147) v1(1957,2413)
NetC11_1: C11.1 F1.1 K2.1 | length 628.1
  Top Layer w7.87: 1342.18,2536 1342.18,2333 1369,2306.18 K2.1
  Top Layer w15: 1342.18,2536 1421.18,2615 C11.1 1584.04,2615 1584.99,2614.06 F1.1
NetC12_2: C12.2 IC2.3 R12.1 | length 349.9
  Top Layer w15: IC2.3 1907.6,3969 1909.37,3970.77 C12.2 1909.37,4144 1910,4144.63 R12.1
NetC14_2: C14.2 C16.2 C20.1 D1.2 IC4.2 IC4.14 IC4.24 IC4.34 L1.1 R16.2 | length 5511.1
  Top Layer w11.81: 1877,2656.3 2188.26,2345.04 IC4.2@2230.59,2345.04 ; D1.2 2148,1437 2148,1654 2148,1791 2256.64,1899.64 2341.66,1899.64 2360.51,1918.49 IC4.14@2360.51,1994.65 ; 2612.48,2700.91 2612.48,2443.46 2612.48,2093.59 IC4.24@2679.41,2093.07
  Top Layer w15: 1877,2656.3 1877,3022 1912,3057 2075,3057 2104,3028 2104,2850 2181.2,2772.8 L1.1 ; C16.2 2028.74,1395.29 2154.03,1270 2403,1270 2433,1300 2433,1479 2400,1512 2290,1512 2148,1654 ; D1.2 2220.31,1364.69 R16.2 ; IC4.2@2230.59,2345.04 2300.46,2345.04 v1@2360.51,2284.99 ; v1(2349.09,2070) 2349.09,2060.53 2358.86,2050.76 2358.86,1996.3 IC4.14@2360.51,1994.65 ; IC4.34@2612.48,2443.46 2679,2450 v1(2685,2444) ; 2612.48,2700.91 2650,2738.43 C14.2 2782,2738.43 2782.32,2738.11 C20.1
  Bottom Layer w15: v1(2349.09,2070) 2359.88,2080.79 2360.51,2080.79 2360.51,2284.99 2383.5,2262 2503,2262 2658,2417 v1(2685,2444)
  other v1: 2350,2280
NetC17_2: C17.2 IC4.16 X1.4 | length 444.6
  Top Layer w11.81: 2423.5,1824.06 IC4.16@2423.5,1994.65
  Top Layer w15: X1.4 2410.39,1699 2384.37,1725.02 C17.2 2423.5,1824.06
NetC19_2: C19.2 IC4.17 X1.1 | length 459.9
  Top Layer w11.81: 2455,1837.5 IC4.17@2455,1994.65
  Top Layer w15: 2455,1837.5 2468.44,1824.06 C19.2 2505.63,1766.37 2560,1712 X1.1
NetC22_2: C22.2 IC4.44 L1.2 | length 461.6
  Top Layer w15: C22.2 2160,2619.69 2234.37,2694.06 L1.2 2285,2574.52 2297.52,2562 IC4.44@2297.52,2443.46
NetC23_2: C23.2 IC4.42 | length 316.9
  Top Layer w11.81: IC4.42@2360.51,2443.46 2360.51,2644.57
  Top Layer w15: 2360.51,2644.57 2400,2684.06 C23.2
NetC24_2: C24.2 IC4.6 | length 273.9
  Top Layer w11.81: 2005,2255 2125.06,2255 2161,2219.06 IC4.6@2230.59,2219.06
  Top Layer w15: 2005,2255 C24.2
NetD2_3: D2.3 K1.2 | length 542.3
  Top Layer w15: D2.3 D2.3@3500,4340
  Top Layer w50: v2(3490,4460) 3490,4350 D2.3@3500,4340
  Bottom Layer w50: v2(3490,4460) 3490,4480 3690,4680 K1.2
NetIC2_1: IC2.1 R10.1 R13.2 | length 1342.1
  Top Layer w15: IC2.1 1982.4,3912.5 2043.5,3930.5 v1(2111,3998) 2129.37,4016.37 R10.1 ; R13.2 2649.28,3273.43 v1(2673.43,3297.57)
  Bottom Layer w15: v1(2111,3998) 2111,3791.5 2190,3712.5 2258.5,3712.5 v1(2673.43,3297.57)
NetIC2_2: IC2.2 R10.2 R15.2 | length 392.7
  Top Layer w11.81: IC2.2 1945,3921.37 2050.63,4027
  Top Layer w15: 2050.63,4027 R10.2 R15.2
NetIC2_5: IC2.5 IC3.1 R22.1 | length 1143.3
  Top Layer w11.81: 1870.2,3585.8 IC2.5 ; 2667.06,3578 2701,3544.06 IC3.1
  Top Layer w15: 1870.2,3585.8 1895,3561 2014,3561 2162,3413 2408,3413 2495,3500 R22.1 2544,3534.69 2587.31,3578 2667.06,3578
NetIC2_6: IC2.6 IC2.7 R21.2 | length 859.7
  Top Layer w15: IC2.7 IC2.6 1907.6,3639.4 1934,3613 v1(1947,3613) ; R21.2 v1(2440,3332)
  Bottom Layer w15: v1(1947,3613) 2013.29,3546.71 2325,3546.71 2440,3431.71 v1(2440,3332)
NetIC3_3: IC3.3 R18.1 T1.D | length 1138.6
  Top Layer w11.81: IC3.3 2740,3649.42 2835,3744.42
  Top Layer w15: 2755,3985 R18.1 2835,3744.42
  Top Layer w50: 2755,3985 T1.D
NetIC3_4: IC3.4 K3.3 R18.2 | length 1335.1
  Top Layer w11.81: 2584,3618.86 IC3.4
  Top Layer w15: R18.2 2520.04,3682.82 2584,3618.86
  Top Layer w50: K3.3 2520.04,4416.81 R18.2
NetIC4_3: IC4.3 R4.2 | length 558.9
  Top Layer w11.81: 2134,2313.54 IC4.3@2230.59,2313.54
  Top Layer w15: R4.2 1729.37,2362.4 2085.15,2362.4 2134,2313.54
NetIC4_4: IC4.4 R6.2 | length 576.7
  Top Layer w11.81: 2097.95,2282.05 IC4.4@2230.59,2282.05
  Top Layer w15: R6.2 1780.68,2209.06 1909.02,2337.4 2042.6,2337.4 2097.95,2282.05
NetK2_2: K2.2 R3.2 R4.1 | length 420.4
  Top Layer w7.87: K2.2 1466.59,2280.59 1511,2325
  Top Layer w15: 1511,2325 R4.1 1650.63,2386.26 R3.2
NetK2_3: K2.3 R2.2 R6.1 | length 435.7
  Top Layer w15: K2.3 1640,2255 R6.1 1651.26,2143.74 R2.2
NetK3_2: K3.2 R11.1 R12.2 R14.2 | length 715.1
  Top Layer w15: R12.2 1831.26,4290 1905,4363.74 R14.2 R11.1 2045.63,4694.37 K3.2
NetR17_1: R17.1 T2.2 T3.1 T4.2 | length 835.1
  Top Layer w15: R17.1 1740.32,3239.69 1760,3259.37 1760,3335.37 ; T2.2 1724.37,3371 1760,3335.37 ; T4.2 1909.37,3374.87 1875,3340.5 T3.1 1825,3234.06 1798,3261.06 1798,3297.37 1760,3335.37
NetR19_2: R19.2 T3.2 | length 137.4
  Top Layer w15: T3.2 1980,3304.06 1984.37,3308.43 R19.2
NetR20_1: R20.1 T2.3 T4.1 | length 770
  Top Layer w15: T2.3 1662.5,3567.63 1679.87,3585 v1(1775,3585) 1798,3585 1830.63,3552.37 T4.1 ; v1(2105.63,3669.01) 2155.63,3619.01 R20.1
  Bottom Layer w15: v1(1775,3585) 1814.37,3585 1898.38,3669.01 ; 1898.01,3669.01 1898.38,3669.01 ; v1(2105.63,3669.01) 1898.38,3669.01
NetR20_2: R20.2 T1.G | length 1301.9
  Top Layer w15: R20.2 v1(2234.37,3618.13) ; v1(2645.62,4097) T1.G
  Bottom Layer w15: v1(2234.37,3618.13) 2068,3784.5 2068,4065 2100,4097 v1(2645.62,4097)
RESET: D1.1 IC4.13 K4.6 R16.1 | length 1745.1
  Top Layer w11.81: 2209.8,1923.05 2314.56,1923.05 2329.02,1937.5 IC4.13@2329.02,1994.65
  Top Layer w15: K4.6 1975.39,1985.91 2023.3,1938 2050,1938 ; D1.1 2259.68,1443.43 R16.1 2389.57,1443.43 2408,1425 2408,1323.5 2387.5,1303 2202,1303 2115,1390 2115,1873 2050,1938 ; 2209.8,1923.05 2194.85,1938 2050,1938
SCK: IC4.9 K4.4 LCD1.4 | length 1970.9
  Top Layer w15: v1(2156,2140) 2171.43,2124.57 IC4.9@2230.59,2124.57
  Bottom Layer w15: LCD1.4 1900,2754.06 1900,1929.05 K4.4 1983.05,1846 2064.5,1846 2081,1862.5 2081,1882 2092,1893 2092,1993 ; 2092,1993 2092,2076 v1(2156,2140) 2156,2057 2092,1993
VIN: C3.1 C4.2 D2.1 D4.2 IC1.3 R7.2 R17.2 T1.S T2.1 | length 12417.7
  Top Layer w15: T2.1 R17.2 1650,3318.43 1637,3305.43 1637,3193 1646,3184 2108,3184 2299,3375 2900,3375 2962,3313 2962,1876 3009,1829 3418,1829 3489,1900 3489,2577 3636,2724 3704.37,2724 ; C3.1 3750.59,4083.07 D2.1 D2.1@3750.59,4330.16 ; 3530.75,4550 3426,4654.75 3426,4672 3426,4800 3452.71,4826.71 3543.29,4826.71 ; R7.2 3704.37,2724 ; 3543.29,4826.71 3822.29,4826.71 4056,4593 ; 3543.29,4826.71 3569,4801 3569,4753 3729,4593 4056,4593 ; 3704.37,2724 3892,2536.37 3892,2040 ; 3892,2040 3892,2032 3900,2032 ; 3892,2040 3900,2032 ; 3900,2032 4020,2032 4149,2161 4149,4500 4056,4593
  Top Layer w50: T1.S 2987.2,4233.2 3078.2,4233.2 3395,4550 3530.75,4550 D2.1@3750.59,4330.16 ; D4.2 3421,3412.8 3443.4,3435.2 IC1.3 3519.45,3504 3570.63,3555.18 C4.2 3570.63,3785 C3.1
pads on no net: D3.2 IC4.1 IC4.8 IC4.12 IC4.19 IC4.20 IC4.21 IC4.22 IC4.25 IC4.26 IC4.30 IC4.32 IC4.33 IC4.39 IC4.40 IC4.41 K2.4

## Silkscreen, mask and mechanical layers (free items; w line width, h text height)
Top Overlay:
  text "Michiel Devue" at 2925,1360 h60
Board outline:
  lines w10: 1235,1230 4185,1230 4190,1235 4190,5000 1235,5000 1235,1230

## Text inside footprints (layer, text, board x,y; h text height)
K1: Top Overlay "0  +" at 3483.15,4865 h60
K3: Top Overlay "0  T  P" at 1803.15,4835 h60